# Altium PCB 14 segment.PcbDoc
Units mil, origin at the board's own origin, x right, y up, seen from the top; angles counter-clockwise.
Board outline 1516 x 846 mil, 2 copper layers (Top Layer, Bottom Layer); 44 components, 49 nets, 102 pads, 42 vias.
Unrouted connection lines stored in the file: 21.
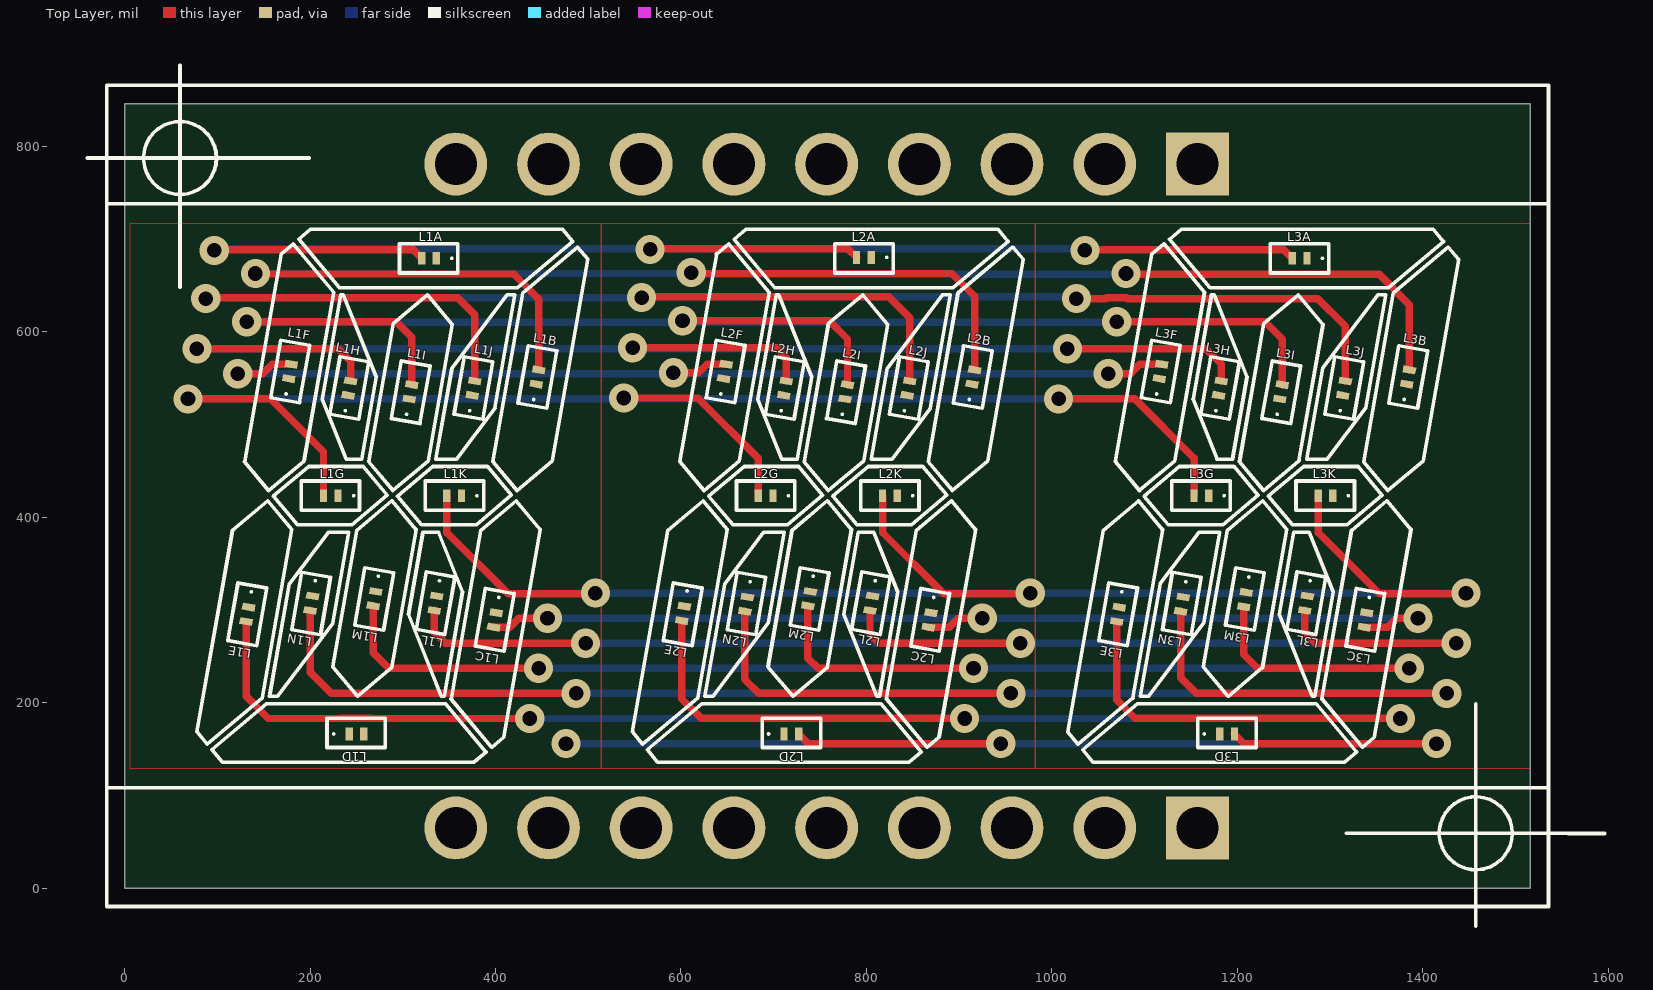
[diagram p0: Top Layer view]
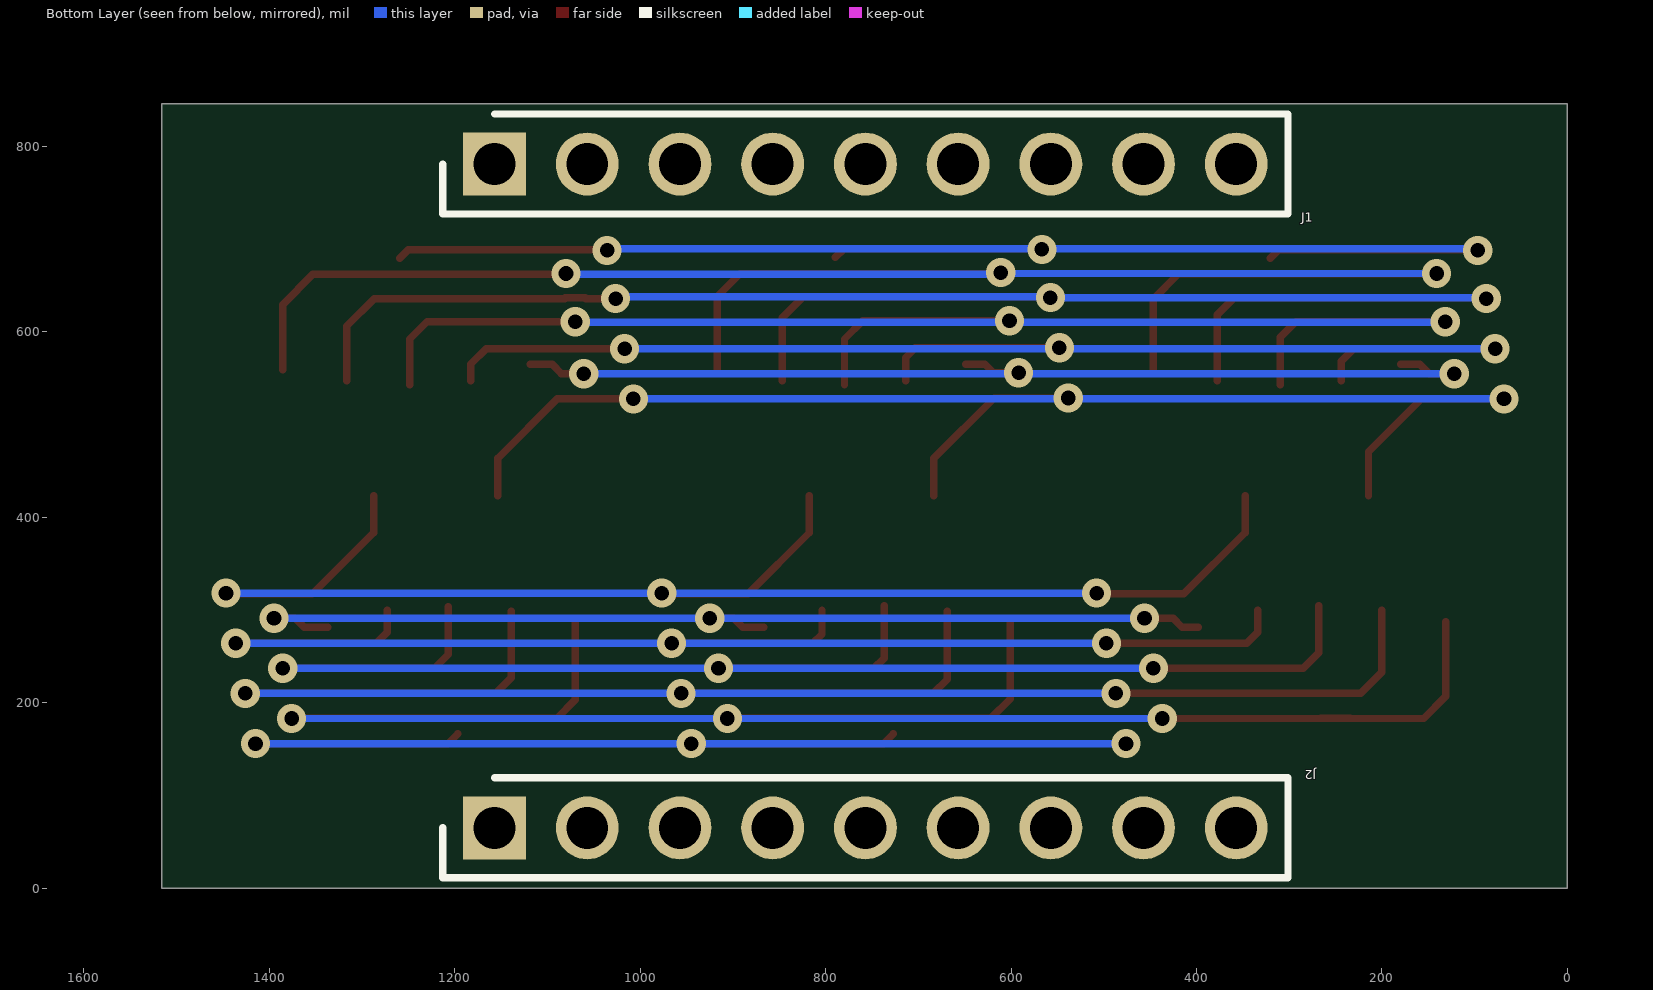
[diagram p1: Bottom Layer view, seen from below]
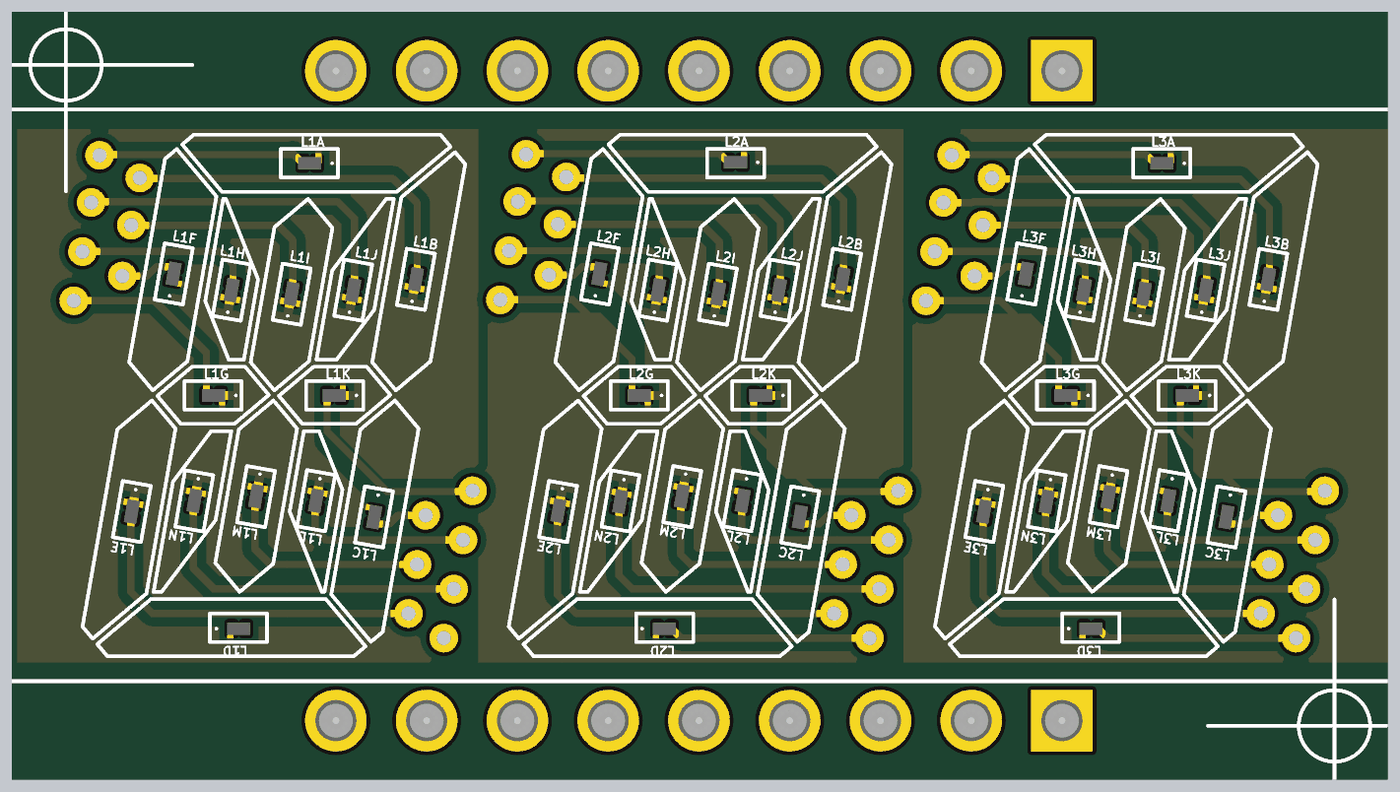
[diagram p2: 3D render of the assembled board from above, using the file's embedded part models]

## Layer stack, top to bottom
Top Solder: solder mask 0.4, Solder Resist, Dk 3.5
Top Layer: signal copper 1.4
Dielectric 1: dielectric 12.6, FR-4, Dk 4.8
Bottom Layer: signal copper 1.4
Bottom Solder: solder mask 0.4, Solder Resist, Dk 3.5

## Board outline
0,0 1516,0 1516,846 0,846

## Design rules (kind name [scope] priority, off if disabled: settings)
Clearance [All] p1: gap=10 except(6: Arc-Track Arc-SMDPad Arc-Via Track-Track Track-SMDPad Track-Via SMDPad-SMDPad SMDPad-Via THPad-Via Via-Via)
PolygonConnect [All] p1: connectstyle=Relief reliefconductorwidth=10 reliefentries=4 polygonreliefangle="90 Angle" airgapwidth=10
RoutingVias [All] p1: holewidth=16 width=32 viastyle="Through Hole" minholewidth=16 minwidth=32 maxholewidth=16 maxwidth=32
SolderMaskExpansion [All] p1: expansion=4
Width [All] p1: maxlimit=8 minlimit=6 preferedwidth=6 minimp=50.000000 maximp=50.000000 favimp=50.000000
30 further rules are at their usual default settings.

## Components (designator, comment, footprint, x,y, rotation, side; value= is the part's Value field where it differs from the comment)
J1 "61300911121" HDRV9W95P0X254_1X9_2286X254X874P 1157.11,781 r180 bottom
J2 "61300911121" HDRV9W95P0X254_1X9_2286X254X874P 1157.11,65 r180 bottom
L1A "APG0603SYC-TT" APG0603SYCTT 328.32,679.31 r180 top
L1B "APG0603SYC-TT" APG0603SYCTT 445.32,551.31 r80 top
L1C "APG0603SYC-TT" APG0603SYCTT 399.32,289.31 r260 top
L1D "APG0603SYC-TT" APG0603SYCTT 250.11,166.33 r0 top
L1E "APG0603SYC-TT" APG0603SYCTT 132.32,295.31 r260 top
L1F "APG0603SYC-TT" APG0603SYCTT 178.32,557.31 r80 top
L1G "APG0603SYC-TT" APG0603SYCTT 222.32,423.31 r180 top
L1H "APG0603SYC-TT" APG0603SYCTT 242.32,539.31 r80 top
L1I "APG0603SYC-TT" APG0603SYCTT 308.32,535.31 r80 top
L1J "APG0603SYC-TT" APG0603SYCTT 376.32,539.31 r80 top
L1K "APG0603SYC-TT" APG0603SYCTT 355.32,423.31 r180 top
L1L "APG0603SYC-TT" APG0603SYCTT 335.32,307.31 r260 top
L1M "APG0603SYC-TT" APG0603SYCTT 269.32,312.31 r260 top
L1N "APG0603SYC-TT" APG0603SYCTT 201.32,307.31 r260 top
L2A "APG0603SYC-TT" APG0603SYCTT 797.32,680.31 r180 top
L2B "APG0603SYC-TT" APG0603SYCTT 915.32,551.31 r80 top
L2C "APG0603SYC-TT" APG0603SYCTT 868.32,289.31 r260 top
L2D "APG0603SYC-TT" APG0603SYCTT 719.11,166.33 r0 top
L2E "APG0603SYC-TT" APG0603SYCTT 602.32,296.31 r260 top
L2F "APG0603SYC-TT" APG0603SYCTT 647.32,557.31 r80 top
L2G "APG0603SYC-TT" APG0603SYCTT 691.32,423.31 r180 top
L2H "APG0603SYC-TT" APG0603SYCTT 712.32,539.31 r80 top
L2I "APG0603SYC-TT" APG0603SYCTT 778.32,535.31 r80 top
L2J "APG0603SYC-TT" APG0603SYCTT 845.32,539.31 r80 top
L2K "APG0603SYC-TT" APG0603SYCTT 825.32,423.31 r180 top
L2L "APG0603SYC-TT" APG0603SYCTT 805.32,307.31 r260 top
L2M "APG0603SYC-TT" APG0603SYCTT 738.32,312.31 r260 top
L2N "APG0603SYC-TT" APG0603SYCTT 670.32,306.31 r260 top
L3A "APG0603SYC-TT" APG0603SYCTT 1267.32,679.31 r180 top
L3B "APG0603SYC-TT" APG0603SYCTT 1384.32,551.31 r80 top
L3C "APG0603SYC-TT" APG0603SYCTT 1338.32,289.31 r260 top
L3D "APG0603SYC-TT" APG0603SYCTT 1189.11,166.33 r0 top
L3E "APG0603SYC-TT" APG0603SYCTT 1071.32,295.31 r260 top
L3F "APG0603SYC-TT" APG0603SYCTT 1117.32,557.31 r80 top
L3G "APG0603SYC-TT" APG0603SYCTT 1161.32,423.31 r180 top
L3H "APG0603SYC-TT" APG0603SYCTT 1181.32,539.31 r80 top
L3I "APG0603SYC-TT" APG0603SYCTT 1247.32,535.31 r80 top
L3J "APG0603SYC-TT" APG0603SYCTT 1315.32,539.31 r80 top
L3K "APG0603SYC-TT" APG0603SYCTT 1295.32,423.31 r180 top
L3L "APG0603SYC-TT" APG0603SYCTT 1274.32,307.31 r260 top
L3M "APG0603SYC-TT" APG0603SYCTT 1208.32,311.31 r260 top
L3N "APG0603SYC-TT" APG0603SYCTT 1140.32,306.31 r260 top

## Footprints (in the part's own frame and the unit in brackets; to place one, negate y for a bottom-side part, rotate by r counter-clockwise, add the part's x,y. Pads: shape width x height; smd on the part's side, far side on the other; paste and mask are expansions set on the pad)
APG0603SYCTT [mm]
  rect 0.2x0.35 smd: 1(-0.2,0) 2(0.2,0)
  silkscreen extent -0.65,-0.02 -0.6,0.02, body extent -0.33,-0.18 0.33,0.18, height 0.35
HDRV9W95P0X254_1X9_2286X254X874P [mm]
  rect 1.725x1.725 hole 1.15: 1(0,0)
  round 1.725 hole 1.15: 2(2.54,0) 3(5.08,0) 4(7.62,0) 5(10.16,0) 6(12.7,0) 7(15.24,0) 8(17.78,0) 9(20.32,0)
  silkscreen extent -1.42,-1.37 21.74,1.37, body extent -1.27,-1.27 21.59,1.27, height 8.74

## Part data
J1 J2: "Connector"
L1A L1B L1C L1D L1E L1F L1G L1H L1I L1J L1K L1L L1M L1N L2A L2B L2C L2D L2E L2F L2G L2H L2I L2J L2K L2L L2M L2N L3A L3B L3C L3D L3E L3F L3G L3H L3I L3J L3K L3L L3M L3N: "LED"

## Via types
v1: diameter 31.5, hole 15.75, Top Layer to Bottom Layer, 42 vias

## Nets (pads, with @x,y where several pads share a name; then routed paths per layer and width w, separated by ;. In a path a pad name is that pad's centre, name@x,y a point inside that pad or via, vN(x,y) a via of type N, cw(c..) or ccw(c..) an arc to the next point about the centre after c; other vN are vias at no path point)
COM0: 
COM1: 
COM2: 
COM3: 
COM4: 
COM5: 
COM6: 
COM7: 
GND: J2.6
NetC1_1: 
NetD1_1: 
NetIC1_26: 
NetIC1_27: 
NetJ1_1: J1.1 L1A.2 L2A.2 L3A.2 | length 1621.4
  Top Layer w8: v1(96.7,687.94) 97.51,688.75 308.99,688.75 ; v1@97,694 v1@97.8,694.8 ; 310,689.76 L1A.2 ; v1(566.7,688.94) 567.51,689.75 780.01,689.75 L2A.2 ; v1(1035.7,687.94) 1036.51,688.75 1250.01,688.75 L3A.2
  Bottom Layer w8: v1(96.7,687.94) 98.51,689.75 v1@1033.9,689.75
NetJ1_2: J1.2 L1B.2 L2B.2 L3B.2 | length 2118
  Top Layer w8: v1@141,662.43 419.57,662.43 446.68,635.32 L1B.2 ; v1@611,663 892,663 916.68,638.32 L2B.2 ; v1@1080,662 1353,662 1385.68,629.32 L3B.2
  Bottom Layer w8: v1@141.8,662.2 v1(141,663) v1@610,663 ; v1(611,664) 612.8,662.2 1079.2,662.2 v1(1080,663)
NetJ1_3: J1.3 L1F.2 L2F.2 L3F.2 | length 1123.6
  Top Layer w8: v1(121.88,554.94) 148.94,554.94 159.07,565.07 L1F.2 ; v1(591.88,555.94) 618.94,555.94 628.07,565.07 L2F.2 ; v1(1060.88,554.94) 1084.94,554.94 1095.07,565.07 L3F.2
  Bottom Layer w8: v1(121.88,554.94) v1(1060.88,554.94)
NetJ1_4: J1.4 L1G.2 L2G.2 L3G.2 | length 1581.4
  Top Layer w8: v1(68.31,527.72) 157.28,527.72 214.44,470.56 L1G.2 ; v1(538.31,528.72) 618.28,528.72 683.44,463.56 L2G.2 ; v1(1007.31,527.72) 1089.28,527.72 1153.44,463.56 L3G.2
  Bottom Layer w8: v1(68.31,527.72) v1(1007.31,527.72)
NetJ1_5: J1.5 L1H.2 L2H.2 L3H.2 | length 1518
  Top Layer w8: v1(77.88,581.83) 230.17,581.83 243.68,568.32 L1H.2 ; v1(547.88,582.83) 703.17,582.83 713.68,572.32 L2H.2 ; v1(1016.88,581.83) 1166.17,581.83 1182.68,565.32 L3H.2
  Bottom Layer w8: v1(77.88,581.83) v1(1016.88,581.83)
NetJ1_6: J1.6 L1I.2 L2I.2 L3I.2 | length 1645
  Top Layer w8: v1(131.7,610.94) 293.06,610.94 309.68,594.32 L1I.2 ; v1(601.7,611.94) 760.06,611.94 779.68,592.32 L2I.2 ; v1(1070,611) 1230,611 1248.68,592.32 L3I.2
  Bottom Layer w8: v1@132.45,610.2 1069.2,610.2 v1(1070,611)
NetJ1_7: J1.7 L1J.2 L2J.2 L3J.2 | length 2039.1
  Top Layer w8: v1(87.53,635.94) 88.28,636.69 359.31,636.69 377.68,618.32 L1J.2 ; v1@87.83,642 v1@88.58,642.75 ; v1(557.53,636.94) 558.28,637.69 824.31,637.69 846.68,615.32 L2J.2 ; v1(1026.53,635.94) 1058.53,635.94 1059.33,636.75 1080.67,636.75 1081.47,635.94 1287.06,635.94 1316.68,606.32 L3J.2
  Bottom Layer w8: v1@88.28,636.69 557.28,636.69 558.28,637.69 1024.79,637.69 v1(1026.53,635.94)
NetJ1_8: J1.8 L1K.2 L2K.2 L3K.2 | length 1620.3
  Top Layer w8: L1K.2 347.44,383.56 413.53,317.47 506.94,317.47 v1(507.74,318.28) ; L2K.2 817.44,383.56 883.53,317.47 975.94,317.47 v1(976.74,318.28) ; L3K.2 1287.44,383.56 1353.53,317.47 1445.94,317.47 v1(1446.74,318.28)
  Bottom Layer w8: v1(507.74,318.28) v1(976.74,318.28) v1(1446.74,318.28)
NetJ1_9: J1.9 L1C.2 L2C.2 L3C.2 | length 1125.3
  Top Layer w8: L1C.2 415.56,281.56 425.22,291.22 v1(456.04,291.22) ; L2C.2 889.56,281.56 899.22,291.22 v1(925.04,291.22) ; L3C.2 1362.56,281.56 1372.22,291.22 v1(1395.04,291.22)
  Bottom Layer w8: v1(456.04,291.22) v1(925.04,291.22) v1(1395.04,291.22)
NetJ2_1: J2.1 L1D.2 L2D.2 L3D.2 | length 1383.6
  Top Layer w8: L2D.2 737.37,155.94 v1(945,155.94) ; L3D.2 1207.37,155.94 v1(1415,155.94)
  Bottom Layer w8: v1(476,155.94) v1(945,155.94) v1(1415,155.94)
NetJ2_2: J2.2 L1L.2 L2L.2 L3L.2 | length 1514.1
  Top Layer w8: L1L.2 333.95,276.05 345.83,264.17 v1(497.16,264.17) ; L2L.2 803.95,274.05 813.83,264.17 v1(966.16,264.17) ; L3L.2 1272.95,276.05 1284.83,264.17 v1(1436.16,264.17)
  Bottom Layer w8: v1(497.16,264.17) v1(966.16,264.17) v1(1436.16,264.17)
NetJ2_3: J2.3 L1E.2 L2E.2 L3E.2 | length 2132.9
  Top Layer w8: L1E.2 130.95,207.05 155,183 233.94,183 234.15,183.22 266.06,183.22 266.28,183 v1(437,183) ; L2E.2 600.95,204.05 621.78,183.22 905.78,183.22 v1(906,183) ; L3E.2 1069.95,203.05 1089.78,183.22 1375.78,183.22 v1(1376,183)
  Bottom Layer w8: v1(437,183) v1(906,183) v1(1376,183)
NetJ2_4: J2.4 L1N.2 L2N.2 L3N.2 | length 2034.3
  Top Layer w8: L1N.2 199.95,233.05 222.94,210.06 v1(486.94,210.06) ; L2N.2 668.95,225.05 683.94,210.06 v1(955.94,210.06) ; L3N.2 1138.95,227.05 1155.94,210.06 v1(1425.94,210.06)
  Bottom Layer w8: v1(486.94,210.06) v1(955.94,210.06) v1(1425.94,210.06)
NetJ2_5: J2.5 L1M.2 L2M.2 L3M.2 | length 1650.9
  Top Layer w8: L1M.2 267.95,254.05 284.89,237.11 v1(446.5,237.11) ; L2M.2 736.95,248.05 747.89,237.11 v1(915.5,237.11) ; L3M.2 1206.95,252.05 1221.89,237.11 v1(1385.5,237.11)
  Bottom Layer w8: v1(446.5,237.11) v1(915.5,237.11) v1(1385.5,237.11)
NetJ2_7: J2.7 L1A.1 L1B.1 L1C.1 L1D.1 L1E.1 L1F.1 L1G.1 L1H.1 L1I.1 L1J.1 L1K.1 L1L.1 L1M.1 L1N.1
NetJ2_8: J2.8 L2A.1 L2B.1 L2C.1 L2D.1 L2E.1 L2F.1 L2G.1 L2H.1 L2I.1 L2J.1 L2K.1 L2L.1 L2M.1 L2N.1
NetJ2_9: J2.9 L3A.1 L3B.1 L3C.1 L3D.1 L3E.1 L3F.1 L3G.1 L3H.1 L3I.1 L3J.1 L3K.1 L3L.1 L3M.1 L3N.1
NetR3_1: 
NetR4_1: 
NetR5_1: 
ROW0: 
ROW1: 
ROW2: 
ROW3: 
ROW4: 
ROW5: 
ROW6: 
ROW7: 
ROW8: 
ROW9: 
ROW10: 
ROW11: 
ROW12: 
ROW13: 
ROW14: 
ROW15: 

## Polygon pours and split planes (outlines as drawn)
NetJ2_9 on Top Layer "Top Layer-No Net" (solid, shelved, pour order 6): 982.2,717 1478.2,717 1516,717 1516,129 1000.2,129 982.2,129
NetJ2_8 on Top Layer "Top Layer-No Net" (solid, shelved, pour order 4): 514,717 982.2,717 982.2,129 532,129 514,129
NetJ2_7 on Top Layer "Top Layer-No Net" (solid, shelved, pour order 2): 6,717 502,717 514,717 514,129 24,129 6,129

## Silkscreen, mask and mechanical layers (free items; w line width, h text height)
Top Overlay:
  drawing of 631 lines, arcs and shapes, not listed
Mechanical 1:
  the board outline again, w10